# Altium PCB TouchBoard.PcbDoc
Units mil, origin at the board's own origin, x right, y up, seen from the top; angles counter-clockwise.
Board outline 1665 x 670 mil, 2 copper layers (Top Layer, Bottom Layer); 4 components, 4 nets, 11 pads, 3 vias.
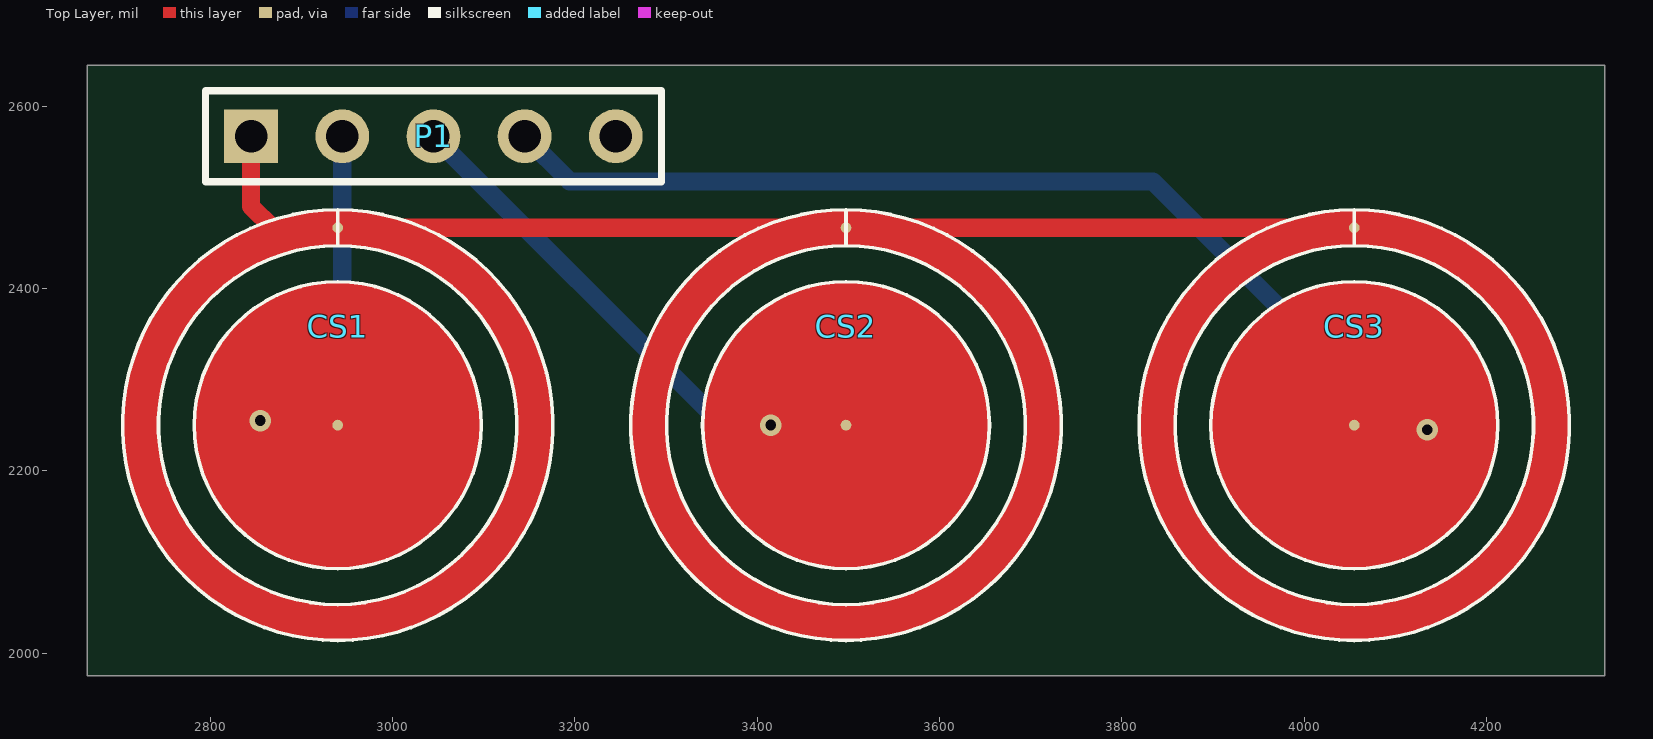
[diagram p0: Top Layer view]
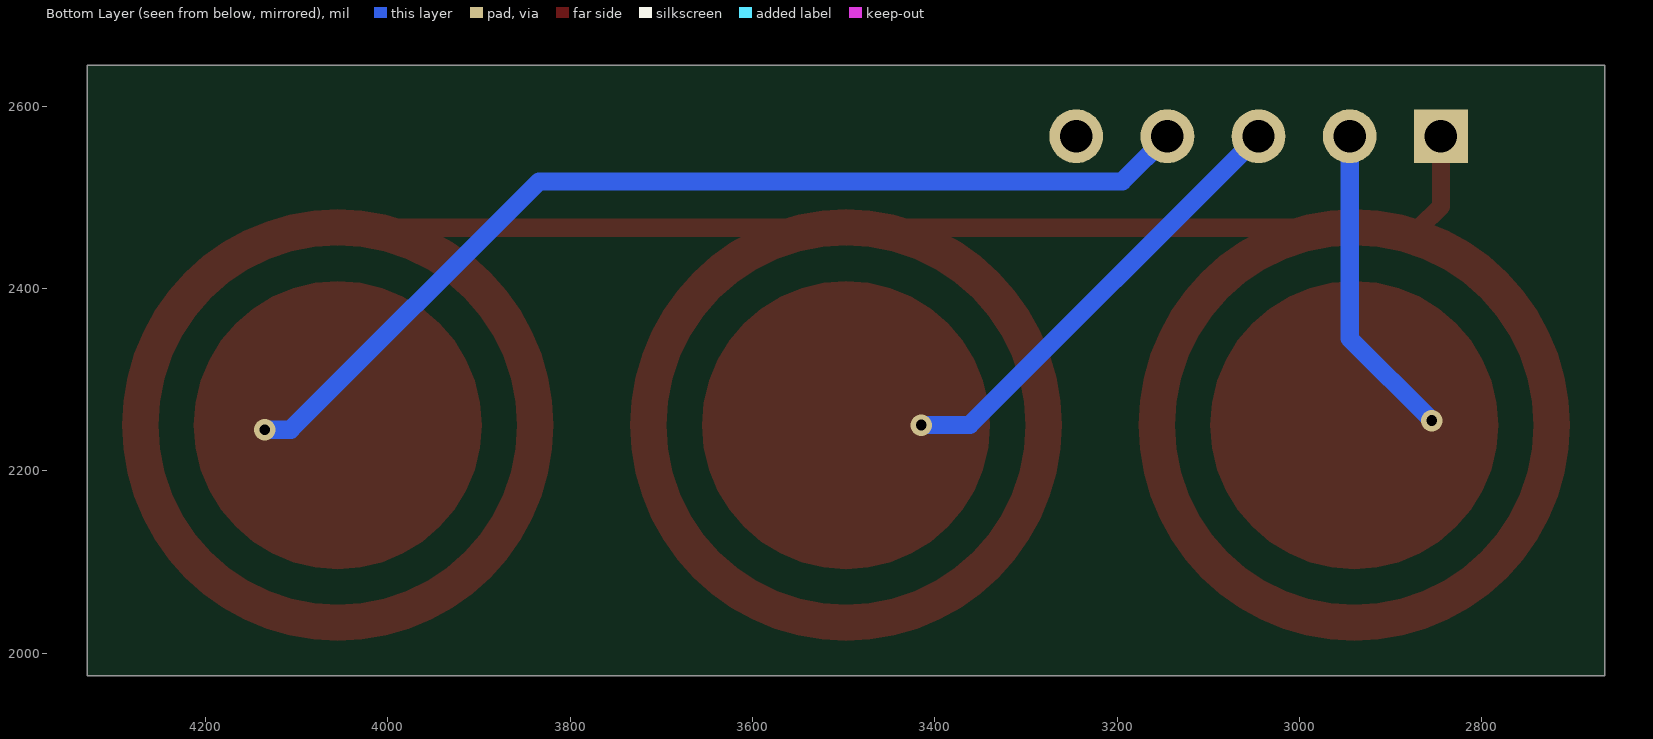
[diagram p1: Bottom Layer view, seen from below]

## Layer stack, top to bottom
Top Solder: solder mask 0.4, Solder Resist, Dk 3.5
Top Layer: signal copper 1.4
Dielectric 1: dielectric 12.6, FR-4, Dk 4.8
Bottom Layer: signal copper 1.4
Bottom Solder: solder mask 0.4, Solder Resist, Dk 3.5

## Board outline
2665,1975 4330,1975 4330,2645 2665,2645

## Design rules (kind name [scope] priority, off if disabled: settings)
Clearance [All] p1: gap=10 ignorepadtopadclearanceinfootprint=FALSE except(0: Arc-Hole Track-Hole SMDPad-Hole THPad-Hole Via-Hole Fill-Hole Poly-Hole Region-Hole Text-Hole)
PolygonConnect [All] p1: connectstyle=Relief reliefconductorwidth=10 reliefentries=4 polygonreliefangle="90 Angle" airgapwidth=10
RoutingVias [All] p1: holewidth=11.81 width=23.62 viastyle="Through Hole" minholewidth=11.81 minwidth=23.62 maxholewidth=11.81 maxwidth=23.62
SolderMaskExpansion [All] p1: expansion=4
Width [All] p1: maxlimit=30 minlimit=10 preferedwidth=20 minimp=50.000000 maximp=50.000000 favimp=50.000000
30 further rules are at their usual default settings.

## Classes and differential pairs
component class Touch: CS1 CS3 P1

## Components (designator, comment, footprint, x,y, rotation, side; value= is the part's Value field where it differs from the comment)
CS1 "Mutual Ring mTouch Sensor" ? 2940,2250 r0 top
CS2 "Mutual Ring mTouch Sensor" ? 3497.5,2250 r0 top
CS3 "Mutual Ring mTouch Sensor" ? 4055,2250 r0 top
P1 "Sensors" HDR1X5 2845,2566.85 r0 top

## Footprints (in the part's own frame and the unit in brackets; to place one, negate y for a bottom-side part, rotate by r counter-clockwise, add the part's x,y. Pads: shape width x height; smd on the part's side, far side on the other; paste and mask are expansions set on the pad)
HDR1X5 [mm] "Connector; Header; 5 Position"
  rect 1.5x1.5 hole 0.9: 1(0,0)
  round 1.5 hole 0.9: 2(2.54,0) 3(5.08,0) 4(7.62,0) 5(10.16,0)
  silkscreen extent -1.27,-1.27 11.43,1.27
? [mm] "SMD, 3-Leads, Body 3.2x1.3mm, Pitch 0.95mm"
  round 0.3 smd paste-0.15: 1(0,0) 2(0,5.5)
  Top Layer region: 0,6 0,6.009 -0.668,5.972 -1.332,5.859 -1.98,5.672 -2.603,5.414 -3.192,5.088 -3.742,4.698 -4.245,4.249 -4.694,3.747 -5.084,3.197 -5.41,2.607 -5.667,1.985 -5.854,1.337 -5.967,0.673 -6.005,0 -5.967,-0.673 -5.854,-1.337 -5.667,-1.985 -5.41,-2.607 -5.084,-3.197 -4.694,-3.747 -4.245,-4.249 -3.742,-4.698 -3.192,-5.088 -2.603,-5.414 -1.98,-5.672 -1.332,-5.859 -0.668,-5.972 0,-6.009 0,-6.009 0.668,-5.972 1.332,-5.859 1.98,-5.672 2.603,-5.414 3.192,-5.088 3.742,-4.698 4.245,-4.249 4.694,-3.747 5.084,-3.197 5.41,-2.607 5.667,-1.985 5.854,-1.337 5.967,-0.673 6.005,0 5.967,0.673 5.854,1.337 5.667,1.985 5.41,2.607 5.084,3.197 4.694,3.747 4.245,4.249 3.742,4.698 3.192,5.088 2.603,5.414 1.98,5.672 1.332,5.859 0.668,5.972 0,6.009 0,5 0,5.01 0.65,4.968 1.293,4.84 1.914,4.629 2.501,4.339 3.046,3.975 3.539,3.543 3.971,3.05 4.335,2.505 4.625,1.918 4.836,1.297 4.964,0.654 5.007,0 4.964,-0.654 4.836,-1.297 4.625,-1.918 4.335,-2.505 3.971,-3.05 3.539,-3.543 3.046,-3.975 2.501,-4.339 1.914,-4.629 1.293,-4.84 0.65,-4.968 0,-5.01 0,-5.01 -0.65,-4.968 -1.293,-4.84 -1.914,-4.629 -2.501,-4.339 -3.046,-3.975 -3.539,-3.543 -3.971,-3.05 -4.335,-2.505 -4.625,-1.918 -4.836,-1.297 -4.964,-0.654 -5.007,0 -4.964,0.654 -4.836,1.297 -4.625,1.918 -4.335,2.505 -3.971,3.05 -3.539,3.543 -3.046,3.975 -2.501,4.339 -1.914,4.629 -1.293,4.84 -0.65,4.968 0,5.01 0,6
  Top Layer region: 0,4 0,4.012 0.624,3.963 1.237,3.816 1.818,3.575 2.355,3.246 2.834,2.837 3.243,2.358 3.572,1.822 3.813,1.24 3.96,0.628 4.009,0 3.96,-0.628 3.813,-1.24 3.572,-1.822 3.243,-2.358 2.834,-2.837 2.355,-3.246 1.818,-3.575 1.237,-3.816 0.624,-3.963 0,-4.012 0,-4.012 -0.624,-3.963 -1.237,-3.816 -1.818,-3.575 -2.355,-3.246 -2.834,-2.837 -3.243,-2.358 -3.572,-1.822 -3.813,-1.24 -3.96,-0.628 -4.009,0 -3.96,0.628 -3.813,1.24 -3.572,1.822 -3.243,2.358 -2.834,2.837 -2.355,3.246 -1.818,3.575 -1.237,3.816 -0.624,3.963 0,4.012
  silkscreen extent -5.99,-6 5.99,6

## Part data
CS1 CS2 CS3: library part mTouchMutualRingSensor, ConfiguratorName=MICROCHIP_TOUCH
  CS1 CS3: ConfigurationParameters==__sensorid[MutualCircle]=inPadDiameter[2]=middlePadDiameter[1]=outPadDiameter[4]=
  CS2: ConfigurationParameters==__sensorid[MutualCircle]=inPadRadius[5]=middlePadWidth[2]=outPadWidth[2]=
P1: library part "Header 5", "Header, 5-Pin", LatestRevisionDate=17-Jul-2002, LatestRevisionNote="Re-released for DXP Platform.", Publisher="Altium Limited"

## Via types
v1: diameter 23.62, hole 11.81, Top Layer to Bottom Layer, 3 vias

## Nets (pads, with @x,y where several pads share a name; then routed paths per layer and width w, separated by ;. In a path a pad name is that pad's centre, name@x,y a point inside that pad or via, vN(x,y) a via of type N, cw(c..) or ccw(c..) an arc to the next point about the centre after c; other vN are vias at no path point)
CS0: CS1.1 P1.2 | length 349.1
  Bottom Layer w20: v1(2855,2255) 2945,2345 P1.2
CS1: CS2.1 P1.3 | length 501.2
  Bottom Layer w20: P1.3 3361.85,2250 v1(3415,2250)
CS3: CS3.1 P1.4 | length 1123.3
  Bottom Layer w20: P1.4 3194.53,2517.32 3834.27,2517.32 4106.59,2245 v1(4135,2245)
Guard: CS1.2 CS2.2 CS3.2 P1.1 | length 1296.6
  Top Layer w20: P1.1 2845,2490 2868.46,2466.54 CS1.2 CS2.2 CS3.2
pads on no net: P1.5

## Silkscreen, mask and mechanical layers (free items; w line width, h text height)
BoardOutline:
  the board outline again, w10